# Altium PCB LP_LED_CUBE_8x8x8.PcbDoc
Units mil, origin at the board's own origin, x right, y up, seen from the top; angles counter-clockwise.
Board outline 5225 x 2080 mil, 2 copper layers (Top Layer, Bottom Layer), stack 65.792 mil thick; 94 components, 108 nets, 524 pads, 0 vias.
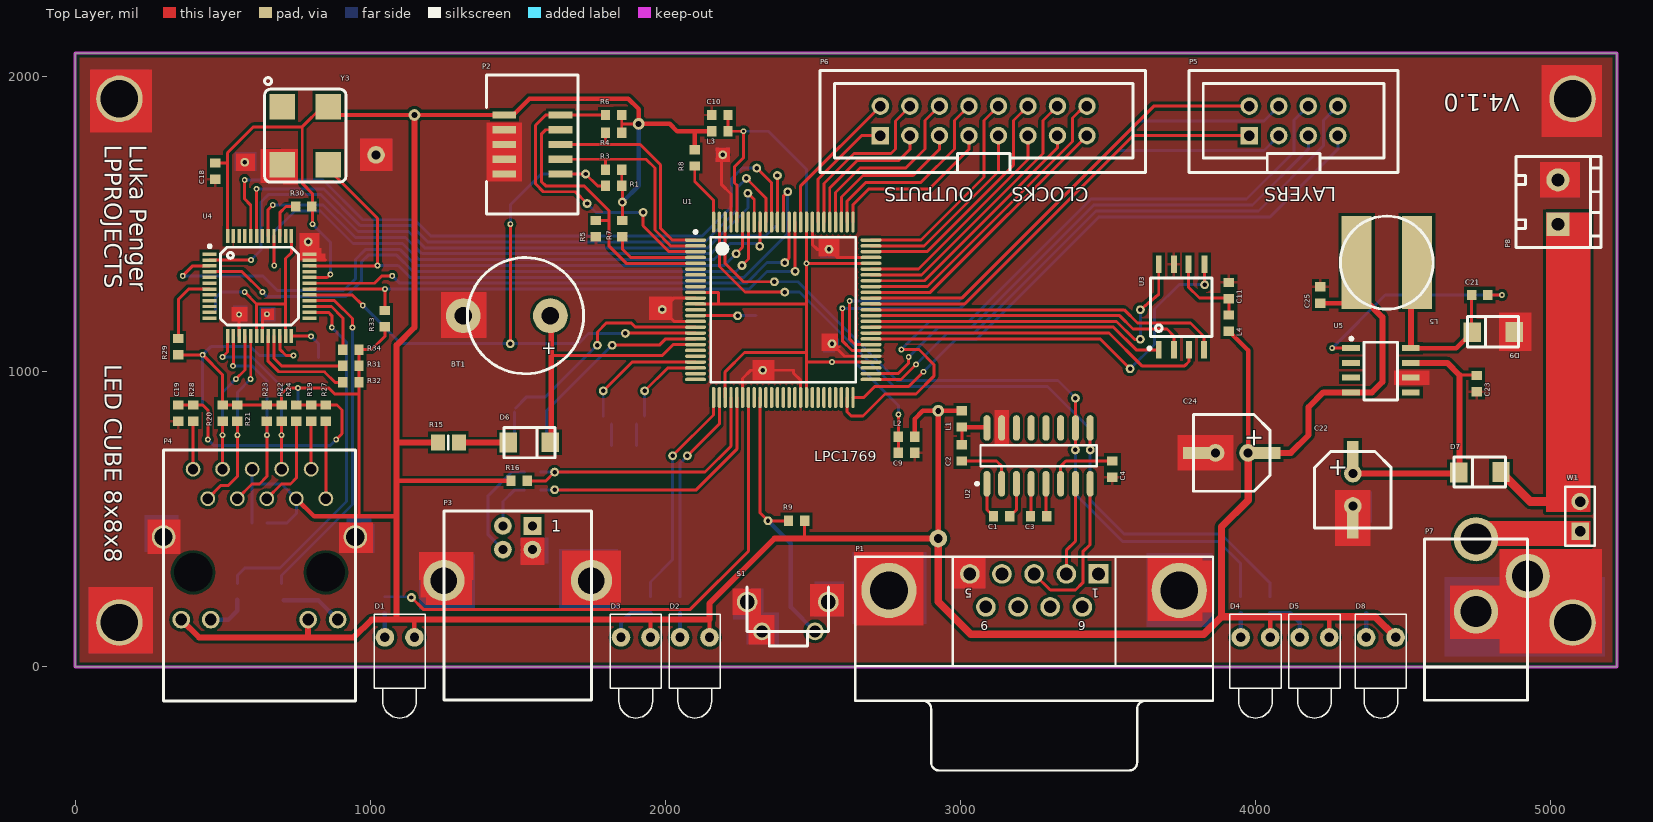
[diagram p0: Top Layer view]
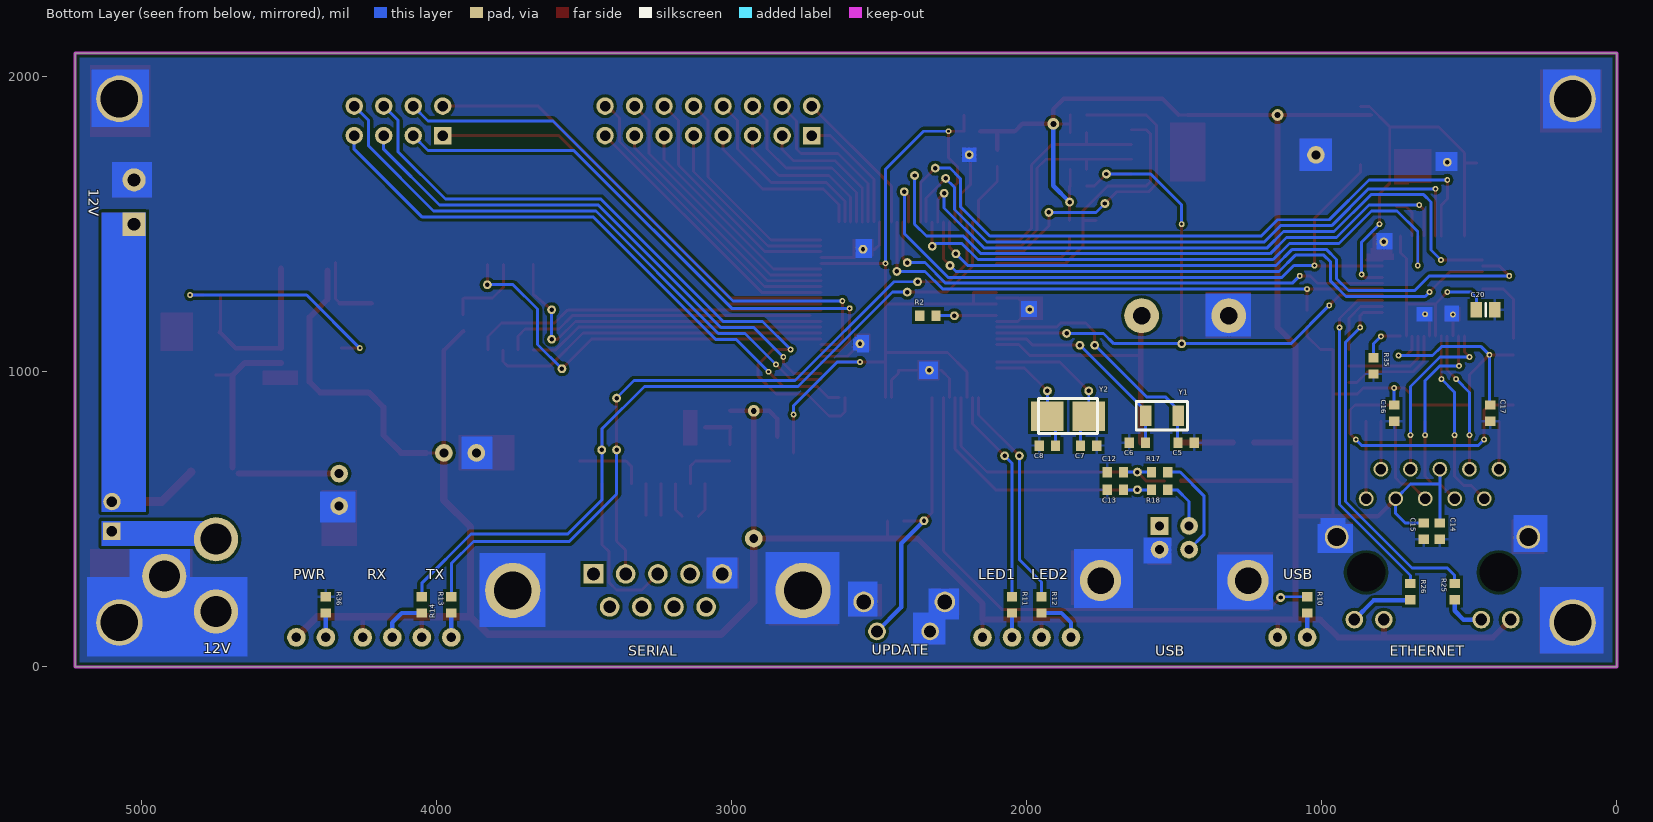
[diagram p1: Bottom Layer view, seen from below]

## Layer stack, top to bottom
Top Layer: signal copper 1.4
Dielectric: core 62.9921, FR-4, Dk 4.8
Bottom Layer: signal copper 1.4

## Board outline
0,0 0,2080 5225,2080 5225,0

## Design rules (kind name [scope] priority, off if disabled: settings)
Clearance [All] p1: gap=10
PolygonConnect [All] p1: connectstyle=Relief reliefconductorwidth=10 reliefentries=4 polygonreliefangle="90 Angle"
RoutingVias [All] p1: holewidth=28 width=50 viastyle="Through Hole" minholewidth=28 minwidth=50 maxholewidth=28 maxwidth=50
SilkscreenOverComponentPads [All] p1: minsilkscreentomaskgap=10
SolderMaskExpansion [All] p1: expansion=4
Width [All] p1: maxlimit=10 minlimit=10 preferedwidth=10
27 further rules are at their usual default settings.

## Classes and differential pairs
component class CPU: BT1 C1 C2 C3 C4 C5 C6 C7 C8 C9 C10 C11 C12 C13 D1 D2 D3 D4 D5 D6 L1 L2 L3 L4 P1 P2 P3 R1 R2 R3 R4 R5 R6 R7 R8 R9 R10 R11 R12 R13 R14 R15 R16 R17 R18 S1 U1 U2 U3 Y1 Y2
component class ETH: C14 C15 C16 C17 C18 C19 C20 P4 R19 R20 R21 R22 R23 R24 R25 R26 R27 R28 R29 R30 R31 R32 R33 R34 R35 U4 Y3
component class POWER: C21 C22 C23 C24 C25 D7 D8 D9 L5 P7 P8 R36 U5 W1
component class LED: P5 P6

## Components (designator, comment, footprint, x,y, rotation, side; value= is the part's Value field where it differs from the comment)
BT1 "Battery" "Battery capacitor" 1660,1190 r180 top
C1 "100n" 1608[0603] 3140,510 r180 top
C2 "100n" 1608[0603] 3005,725 r90 top
C3 "100n" 1608[0603] 3265,510 r180 top
C4 "100n" 1608[0603] 3515,670 r90 top
C5 "22p" 1608[0603] 1460,760 r0 bottom
C6 "22p" 1608[0603] 1625,760 r180 bottom
C7 "22p" 1608[0603] 1790,750 r0 bottom
C8 "22p" 1608[0603] 1930,750 r180 bottom
C9 "100n" 1608[0603] 2817.56,725 r0 top
C10 "100n" 1608[0603] 2185,1870 r0 top
C11 "100n" 1608[0603] 3910,1275 r270 top
C12 "18p" 1608[0603] 1700,660 r0 bottom
C13 "18p" 1608[0603] 1700,600 r0 bottom
C14 "100n" 1608[0603] 600,460 r90 bottom
C15 "100n" 1608[0603] 655,460 r90 bottom
C16 "100n" 1608[0603] 755,860 r90 bottom
C17 "100n" 1608[0603] 430,860 r90 bottom
C18 "100n" 1608[0603] 475,1680 r90 top
C19 "100n" 1608[0603] 350,860 r270 top
C20 "1uF" 6-0805_L 445,1210 r180 bottom
C21 "10n" 1608[0603] 4760,1260 r0 top
C22 "220uF" "SMD CAPACITOR 220uF" 4330,600 r0 top
C23 "100n" 1608[0603] 4750,960 r270 top
C24 "220uF" "SMD CAPACITOR 220uF" 3920,725 r270 top
C25 "100n" 1608[0603] 4220,1260 r90 top
D1 "USB LED" LED-1 1100,100 r270 top
D2 "LED1" LED-1 2100,100 r270 top
D3 "LED2" LED-1 1900,100 r270 top
D4 "LED4" LED-1 4000,100 r270 top
D5 "LED5" LED-1 4200,100 r270 top
D6 "1N5819" "DO-214AC (SMA)" 1540,760 r0 top
D7 "1N5819" "DO-214AC (SMA)" 4760,660 r180 top
D8 "POWER LED" LED-1 4425,100 r270 top
D9 "1N5819" "DO-214AC (SMA)" 4805,1135 r180 top
L1 "Inductor" 1608[0603] 3005,840 r90 top
L2 "Inductor" 1608[0603] 2817.56,780 r180 top
L3 "Inductor" 1608[0603] 2185,1815 r0 top
L4 "Inductor" 1608[0603] 3910,1165 r270 top
L5 "100uH" SDR0805-101KL 4445,1370 r180 top
P1 "RS232" DSUB1.385-2H9 3250,-115 r180 top
P2 "JTAG Connector ULINK" "SMT IDC Header 2X5 10 PIN 1.27mm" 1550,1770 r0 top
P3 "USB B" "USB B" 1500,385 r0 top
P4 "RJ45 Ethernet" "RJ45 Ethernet connector" 625,415 r90 top locked
P5 "LED Layers Connector" IDC-2x4 3775,1675 r0 top
P6 "LED Connector" IDC-2x8 2525,1675 r0 top
P7 "DC Connector" "DC Connector" 4835,310 r180 top
P8 "Power to board" "Block2 - 3.81" 5025,1650 r90 top
R1 "10k" 1608[0603] 1825,1630 r0 top
R2 "NO" 1608[0603] 2335,1190 r0 bottom
R3 "10k" 1608[0603] 1825,1685 r0 top
R4 "10k" 1608[0603] 1825,1810 r0 top
R5 "10k" 1608[0603] 1765,1485 r270 top
R6 "10k" 1608[0603] 1825,1870 r0 top
R7 "10k" 1608[0603] 1855,1485 r90 top
R8 "10k" 1608[0603] 2100,1725 r90 top
R9 "1k" 1608[0603] 2445,495 r180 top
R10 "470R" 1608[0603] 1050,210 r270 bottom
R11 "470R" 1608[0603] 2050,210 r270 bottom
R12 "470R" 1608[0603] 1950,210 r270 bottom
R13 "470R" 1608[0603] 3950,210 r270 bottom
R14 "470R" 1608[0603] 4050,210 r270 bottom
R15 "50R" 6-0805_N 1265,760 r180 top
R16 "1k5" 1608[0603] 1505,630 r0 top
R17 "33R" 1608[0603] 1550,660 r180 bottom
R18 "33R" 1608[0603] 1550,600 r180 bottom
R19 "75R 1%" 1608[0603] 800,860 r90 top
R20 "49R9 1%" 1608[0603] 500,860 r90 top
R21 "49R9 1%" 1608[0603] 550,860 r90 top
R22 "49R9 1%" 1608[0603] 700,860 r90 top
R23 "49R9 1%" 1608[0603] 650,860 r90 top
R24 "75R 1%" 1608[0603] 750,860 r90 top
R25 "470R" 1608[0603] 550,255 r90 bottom
R26 "470R" 1608[0603] 700,255 r90 bottom
R27 "75R 1%" 1608[0603] 850,860 r270 top
R28 "75R 1%" 1608[0603] 400,860 r270 top
R29 "10k" 1608[0603] 350,1085 r270 top
R30 "2k2" 1608[0603] 775,1560 r180 top
R31 "2k2" 1608[0603] 935,1020 r180 top
R32 "2k2" 1608[0603] 935,965 r0 top
R33 "2k2" 1608[0603] 1050,1180 r90 top
R34 "2k2" 1608[0603] 935,1075 r180 top
R35 "4k7" 1608[0603] 825,1020 r270 bottom
R36 "470R" 1608[0603] 4375,210 r270 bottom
S1 "FW Update" SWITCH-TACTILE-90 2415,170 r0 top
U1 "LPC176XFBD100" SOT407-1_N 2400,1210 r0 top
U2 "TRS3232" SOIC16_N 3265,715 r90 top
U3 "AT45DB321E" AT45DB321 3750,1220 r90 top
U4 "DP83848C" DP83848C 625,1290 r0 top
U5 "LM2671 - 3.3V" SOIC8_Narrow 4425,1005 r0 top
W1 "Jumper" HDR1X2 5100,460 r90 top
Y1 "32.768 kHz" "Crystal FC-135" 1550,850 r0 bottom
Y2 "12 MHz" "5x3.2 Crystal" 1860,850 r0 bottom
Y3 "XTAL 50MHz" "XTAL ACT9200 5x7mm" 780,1800 r270 top

## Footprints (in the part's own frame and the unit in brackets; to place one, negate y for a bottom-side part, rotate by r counter-clockwise, add the part's x,y. Pads: shape width x height; smd on the part's side, far side on the other; paste and mask are expansions set on the pad)
"5x3.2 Crystal" [mil]
  rect 110x100 smd: 1(-70,0) 2(70,0)
  silkscreen extent -100,-60 100,60
6-0805_L [mm] "Chip Resistor, Body 2.0x1.2mm, IPC High Density"
  rect 1x1.3 smd: 1(-0.8,0) 2(0.8,0)
  silkscreen extent 0,-0.55 0,0.55, body extent -1.07,-0.7 1.07,0.7, height 0.7
6-0805_N [mm] "Chip Resistor, Body 2.0x1.2mm, IPC Medium Density"
  rect 1.2x1.4 smd: 1(-0.9,0) 2(0.9,0)
  silkscreen extent 0,-0.6 0,0.6, body extent -1.07,-0.7 1.07,0.7, height 0.7
1608[0603] [mm] "Chip Capacitor, Body 1.6x0.8mm, IPC High Density"
  rect 0.8x0.9 smd: 1(-0.7,0) 2(0.7,0)
  body extent -0.87,-0.48 0.87,0.48, height 1.3
AT45DB321 [mm] "SPI Flash SOIC 8"
  rect 1.5x0.508 smd: 1(-3.7,1.975) 2(-3.7,0.675) 3(-3.7,-0.625) 4(-3.7,-1.925) 5(3.65,-1.975) 6(3.65,-0.575) 7(3.65,0.675) 8(3.65,1.975)
  silkscreen extent -3.7,-2.62 2.5,2.9
"Battery capacitor" [mm] "Battery cap"
  round 3 hole 1.5: 1(1.25,0) 2(8.75,0)
  silkscreen extent -1.6,-5 8.4,5
"Block2 - 3.81" [mm] "3.81mm"
  rect 2x2 hole 1.1: 1(-3.81,0)
  round 2 hole 1.1: 2(0,0)
  silkscreen extent -5.81,-3.7 2,3.6
"Crystal FC-135" [mm] "3.2x1.5mm"
  rect 1x1.8 smd: 1(-1.6,-0.02) 2(1.194,-0.025)
  silkscreen extent -2.4,-1.25 2.01,1.2
"DC Connector" [mil]
  round 150 hole 105: 1(87.5,-122.5) 2(87.5,122.5) 3(-87.5,2.5)
  silkscreen extent -88,-123 262,423
"DO-214AC (SMA)" [mm]
  rect 1.5x1.7 smd: 1(-1.829,0) 2(1.803,0.025)
  silkscreen extent -2.21,-1.31 2.21,1.28
DP83848C [mm] "Ethernet PHY LQFP48"
  rect 1.2x0.3 smd: 1(-4.3,2.75) 2(-4.3,2.25) 3(-4.3,1.75) 4(-4.3,1.25) 5(-4.3,0.75) 6(-4.3,0.25) 7(-4.3,-0.25) 8(-4.3,-0.75) 9(-4.3,-1.25) 10(-4.3,-1.75) 11(-4.3,-2.25) 12(-4.3,-2.75) 25(4.3,-2.75) 26(4.3,-2.25) 27(4.3,-1.75) 28(4.3,-1.25) 29(4.3,-0.75) 30(4.3,-0.25) 31(4.3,0.25) 32(4.3,0.75) 33(4.3,1.25) 34(4.3,1.75) 35(4.3,2.25) 36(4.3,2.75)
  rect 0.3x1.2 smd: 13(-2.75,-4.3) 14(-2.25,-4.3) 15(-1.75,-4.3) 16(-1.25,-4.3) 17(-0.75,-4.3) 18(-0.25,-4.3) 19(0.25,-4.3) 20(0.75,-4.3) 21(1.25,-4.3) 22(1.75,-4.3) 23(2.25,-4.3) 24(2.75,-4.3) 37(2.75,4.3) 38(2.25,4.3) 39(1.75,4.3) 40(1.25,4.3) 41(0.75,4.3) 42(0.25,4.3) 43(-0.25,4.3) 44(-0.75,4.3) 45(-1.25,4.3) 46(-1.75,4.3) 47(-2.25,4.3) 48(-2.75,4.3)
  silkscreen extent -4.41,-3.35 3.35,3.56
DSUB1.385-2H9 [mm] "Connector; D Subminiature; 9 Position; Right Angle; Pitch 1.385 mm"
  rect 1.69x1.69 hole 1.09: 1(-5.54,-10.92)
  round 1.69 hole 1.09: 2(-2.77,-10.92) 3(0,-10.92) 4(2.77,-10.92) 5(5.54,-10.92) 6(-4.155,-8.08) 7(-1.385,-8.08) 8(1.385,-8.08) 9(4.155,-8.08)
  round 4.76 hole 3.26: 10(-12.495,-9.5) 11(12.495,-9.5)
  silkscreen extent -15.4,-12.4 15.4,6
HDR1X2 [mm] "Connector; Header; 2 Position"
  rect 1.5x1.5 hole 0.9: 1(0,0)
  round 1.5 hole 0.9: 2(2.54,0)
  silkscreen extent -1.27,-1.27 3.81,1.27
IDC-2x4 [mm] "IDC Male Connector"
  rect 1.5x1.5 hole 0.9: 1(5.182,3.175)
  round 1.5 hole 0.9: 2(5.182,5.715) 3(7.722,3.175) 4(7.722,5.715) 5(10.262,3.175) 6(10.262,5.715) 7(12.802,3.175) 8(12.802,5.715)
  silkscreen extent 0,0 17.98,8.8
IDC-2x8 [mm] "IDC Male Connector"
  rect 1.5x1.5 hole 0.9: 1(5.182,3.175)
  round 1.5 hole 0.9: 2(5.182,5.715) 3(7.722,3.175) 4(7.722,5.715) 5(10.262,3.175) 6(10.262,5.715) 7(12.802,3.175) 8(12.802,5.715) 9(15.342,3.175) 10(15.342,5.715) 11(17.882,3.175) 12(17.882,5.715) 13(20.422,3.175) 14(20.422,5.715) 15(22.962,3.175) 16(22.962,5.715)
  silkscreen extent 0,0 28,8.8
LED-1 [mm] "LED; 2 Leads"
  round 1.6 hole 0.8: 1(0,1.27) 2(0,-1.27)
  silkscreen extent -2,-2.2 6.95,2.2
"RJ45 Ethernet connector" [mil]
  round 50 hole 35: 1(155,175) 2(255,125) 3(155,75) 4(255,25) 5(155,-25) 6(255,-75) 7(155,-125) 8(255,-175) 9(255,225) 10(155,-225)
  round 60 hole 40: 11(-255,265) 12(-255,165) 13(-255,-165) 14(-255,-265)
  round 80 hole 62: GND(25,325) GND(25,-325)
  round 0 hole 130: ""(-95,225) ""(-95,-225)
  silkscreen extent -530,-325 320,325
SDR0805-101KL [mm] "SMD Power Inductor"
  rect 2.6x8 smd: 1(-2.6,0) 2(2.6,0)
  silkscreen extent -4,-4 4,4
"SMD CAPACITOR 220uF" [mil]
  round 60 hole 30: 1(0,55) 2(0,-55)
  rect 40x100 smd: 1(0,115) 2(0,-115)
  silkscreen extent -130,-130 130,130
"SMT IDC Header 2X5 10 PIN 1.27mm" [mil]
  rect 80x25 smd: 1(-95,100) 2(95,100) 3(-95,50) 4(95,50) 5(-95,0) 6(95,0) 7(-95,-50) 8(95,-50) 9(-95,-100) 10(95,-100)
  silkscreen extent -155,-235 155,235
SOIC8_Narrow [mil]
  rect 60x20 smd: 1(-101.5,75) 2(-101.5,25) 3(-101.5,-25) 4(-101.5,-75) 5(101.5,-75) 6(101.5,-25) 7(101.5,25) 8(101.5,75)
  silkscreen extent -105,-100 57,112
SOIC16_N [mm] "SOIC, 16-Leads, Body 9.9x3.9mm, Pitch 1.27mm, IPC Medium Density"
  oval 2.2x0.6 smd: 1(-2.4,4.445) 2(-2.4,3.175) 3(-2.4,1.905) 4(-2.4,0.635) 5(-2.4,-0.635) 6(-2.4,-1.905) 7(-2.4,-3.175) 8(-2.4,-4.445) 9(2.4,-4.445) 10(2.4,-3.175) 11(2.4,-1.905) 12(2.4,-0.635) 13(2.4,0.635) 14(2.4,1.905) 15(2.4,3.175) 16(2.4,4.445)
  silkscreen extent -2.52,-5 0.9,5.42, body extent -2,-5 2,5, height 1.91
SOT407-1_N [mm] "Thin QFP, 100-Leads, Body 14x14mm, Pitch 0.5mm, IPC Medium Density"
  oval 1.8x0.3 smd: 1(-7.55,6) 2(-7.55,5.5) 3(-7.55,5) 4(-7.55,4.5) 5(-7.55,4) 6(-7.55,3.5) 7(-7.55,3) 8(-7.55,2.5) 9(-7.55,2) 10(-7.55,1.5) 11(-7.55,1) 12(-7.55,0.5) 13(-7.55,0) 14(-7.55,-0.5) 15(-7.55,-1) 16(-7.55,-1.5) 17(-7.55,-2) 18(-7.55,-2.5) 19(-7.55,-3) 20(-7.55,-3.5) 21(-7.55,-4) 22(-7.55,-4.5) 23(-7.55,-5) 24(-7.55,-5.5) 25(-7.55,-6) 51(7.55,-6) 52(7.55,-5.5) 53(7.55,-5) 54(7.55,-4.5) 55(7.55,-4) 56(7.55,-3.5) 57(7.55,-3) 58(7.55,-2.5) 59(7.55,-2) 60(7.55,-1.5) 61(7.55,-1) 62(7.55,-0.5) 63(7.55,0) 64(7.55,0.5) 65(7.55,1) 66(7.55,1.5) 67(7.55,2) 68(7.55,2.5) 69(7.55,3) 70(7.55,3.5) 71(7.55,4) 72(7.55,4.5) 73(7.55,5) 74(7.55,5.5) 75(7.55,6)
  oval 0.3x1.8 smd: 26(-6,-7.55) 27(-5.5,-7.55) 28(-5,-7.55) 29(-4.5,-7.55) 30(-4,-7.55) 31(-3.5,-7.55) 32(-3,-7.55) 33(-2.5,-7.55) 34(-2,-7.55) 35(-1.5,-7.55) 36(-1,-7.55) 37(-0.5,-7.55) 38(0,-7.55) 39(0.5,-7.55) 40(1,-7.55) 41(1.5,-7.55) 42(2,-7.55) 43(2.5,-7.55) 44(3,-7.55) 45(3.5,-7.55) 46(4,-7.55) 47(4.5,-7.55) 48(5,-7.55) 49(5.5,-7.55) 50(6,-7.55) 76(6,7.55) 77(5.5,7.55) 78(5,7.55) 79(4.5,7.55) 80(4,7.55) 81(3.5,7.55) 82(3,7.55) 83(2.5,7.55) 84(2,7.55) 85(1.5,7.55) 86(1,7.55) 87(0.5,7.55) 88(0,7.55) 89(-0.5,7.55) 90(-1,7.55) 91(-1.5,7.55) 92(-2,7.55) 93(-2.5,7.55) 94(-3,7.55) 95(-3.5,7.55) 96(-4,7.55) 97(-4.5,7.55) 98(-5,7.55) 99(-5.5,7.55) 100(-6,7.55)
  silkscreen extent -7.67,-6.25 6.25,6.82, body extent -7,-7 7,7, height 1.6
SWITCH-TACTILE-90 [mil]
  round 60 hole 40: 1(-87.5,-50) 2(92.5,-50)
  round 70 hole 50: GND(-137.5,50) GND(137.5,50)
  silkscreen extent -138,-100 138,100
"USB B" [mil]
  rect 60x60 hole 30: 1(50,92.5)
  round 60 hole 30: 2(-50,92.5) 3(-50,12.5) 4(50,12.5)
  round 140 hole 90: 5(-250,-92.5) 5(250,-92.5)
  silkscreen extent -250,-498 250,142
"XTAL ACT9200 5x7mm" [mm] "5x7mm"
  rect 2.2x2.2 smd mask-25.4: 1(-2.5,-1.992) 2(2.5,-1.992) 3(2.5,1.992) 4(-2.5,1.992)
  silkscreen extent -4.99,-3.5 4,3.52

## Part data
BT1: "Multicell Battery"
C1 C2 C3 C4 C5 C6 C7 C8 C9 C10 C11 C12 C13 C14 C15 C16 C17 C18 C19 C20 C21 C23 C25: library part Cap, "Capacitor"
C22 C24: library part "Cap Pol1", "Capacitor"
D1 D2 D3 D4 D5 D8: library part LED0, "Typical INFRARED GaAs LED"
D6 D7 D9: library part "D Schottky", "Schottky Diode"
L5: library part Inductor, "Inductor"
P1: library part "D Connector 9", "Receptacle Assembly, 9 Position, Right Angle"
P2: "JTAG Connector"
P3: "USB Connector"
P4: "Ethernet Connector"
P5: library part "Header 4X2", "Header, 4-Pin, Dual row"
P6: library part "Header 8X2", "Header, 8-Pin, Dual row"
P7: "DC Power Connector"
P8: library part "Header 2", "Header, 2-Pin"
R1 R2 R3 R4 R5 R6 R7 R8 R9 R10 R11 R12 R13 R14 R15 R16 R17 R18 R19 R20 R21 R22 R23 R24 R25 R26 R27 R28 R29 R30 R31 R32 R33 R34 R35 R36: library part Res2, "Resistor"
S1: library part SW-PB, "Switch"
U1: library part LPC1768FBD100, "32-bit ARM Cortex-M3 microcontroller; up to 512 kB flash and 64 kB SRAM with Ethernet, USB 2.0 Host/Device/OTG, CAN"
U2: library part MAX2232, "Dual 232 +3V3"
U3: library part AT45DB321D, "SPI Flash 32MB"
U4: "Ethernet PHY"
U5: library part LM2671, "Switcher Voltage  Regulator"
W1: "Jumper Wire"
Y1 Y2: library part XTAL, "Crystal Oscillator"
Y3: library part "XTAL ACT9200"

## Free pads (board coordinates)
  round 30 hole 15: 0(575,1710) 4(790,1440) 5(3827.76,1295) 6(2565,1095) 7(1990,1210.92) 8(1140,235) 10(2195,1735) 17(1475,1095) 25(3390,735) 25(3440,735) 27(1625,600) 27(1625,660) 27(2330,1005) 28(2025,715) 29(2075,715) 35(1735,1570) 36(1925,1540) 37(2405,1270) 37(2405,1270) 38(2370,1305) 38(2370,1305) 39(3390,910.61) 41(2555,1415) 42(2440,1340) 43(2405,1370) 46(2415,1610) 50(2260,1360) 53(2240,1400) 56(2320,1425) 57(2380,1665) 61(2280,1605) 62(2275,1655) 63(2310,1690) 70(2348.13,495) 76(1855,1575) 79(3610,1110) 80(3610,1210) 82(3575,1010) 84(1790,935) 84(1930,935) 86(2245,1190) 88(1770,1090) 89(1820,1090) 91(1730,1670) 92(1865,1130.03)
  round 20 hole 10: 0(2625,1240) 1(2600,1215) 2(556.1,1193.9) 2(2800,1075) 2(4260,1080) 3(2825,1050) 3(4835,1260) 4(2850,1025) 5(2875,1000) 7(2478.74,1367.48) 8(2265,1815) 9(2565,1032.83) 10(2790,855) 12(1475,1500) 16(575,1270) 17(550,785) 18(500,785) 19(595,975) 20(545,975) 21(650,785) 22(700,785) 23(535.07,1020) 24(500,1050) 25(870,1150) 26(940,1150) 27(885,770) 28(450,770) 29(800,1120) 30(650,1195) 31(740,1055) 32(432.56,1057.44) 33(975,1225) 34(755,945) 44(1050,1280.02) 45(1075,1325) 47(1025,1360) 48(865,1330) 49(805,1500) 51(635,1270) 52(365,1325) 54(675,1360) 55(670,1565) 58(596.42,1378.58) 58(596.42,1378.58) 59(575,1650) 60(615,1620)
  round 40 hole 20: 11(1150,1870) 69(2925,867.56) 78(1910,1840)
  round 60 hole 30: 30(1020,1735) 68(2925,435)
  round 157.48 hole 125.98: ""(150,150) ""(150,1925) ""(5075,150) ""(5075,1925)

## Nets (pads, with @x,y where several pads share a name; then routed paths per layer and width w, separated by ;. In a path a pad name is that pad's centre, name@x,y a point inside that pad or via, vN(x,y) a via of type N, cw(c..) or ccw(c..) an arc to the next point about the centre after c; other vN are vias at no path point)
3V3: C14.2 C15.2 C16.2 C17.2 C18.2 C24.1 C25.1 D1.1 D2.1 D3.1 D4.1 D5.1 D8.1 L1.2 L2.1 L3.1 L4.2 L5.2 P2.1 P4.4 P4.7 P4.11 P4.13 pad.11 pad.31 pad.32 pad.34 pad.48 pad.49 pad.68 pad.69 pad.76 pad.78 R1.2 R3.2 R4.2 R6.2 R7.2 R8.2 R9.1 R15.2 R16.1 R20.2 R21.2 R22.2 R23.2 R29.2 R30.1 R31.1 R32.2 R33.1 R34.1 U4.22 U4.32 U4.48 U5.4 Y3.4 | length 16736.3
  Top Layer w10: R29.2 pad.32 500,990 R20.2 R21.2 R23.2 R22.2 700,925 720,945 pad.34 860,945 880,925 962.56,925 ; C18.2 516.73,1707.56 ; U4.48 516.73,1741.73 605,1830 770,1830 ; U4.22 693.9,1076.1 715,1055 pad.31 ; U4.32 854.53,1319.53 pad.48 ; pad.49 805,1603.37 770,1638.37 770,1830 ; Y3.4@868.43,1898.43 838.43,1898.43 770,1830 ; 962.56,512.44 962.56,925 ; R33.1 1050,1120 1005,1075 R34.1 R31.1 962.56,925 ; P2.1 P2.1@1485,1870 ; R1.2 R3.2 ; R4.2 R6.2 ; 1852.56,1840 pad.78 ; R7.2 pad.76 R1.2@1855,1630 ; 2472.56,437.44 R9.1 ; C24.1@3975,725 C24.1@4035,725 ; L5.2@4327.44,1232.44 4342.64,1247.64 L5.2
  Top Layer w15: P4.7 810,510 1090,510 ; Y3.4@835,1870 P2.1 ; 1090,630 R16.1 ; D1.1 1150,160 ; P2.1@1485,1870 1540,1925 1875,1925 1910,1890 pad.78 2015,1840 2040,1815 L3.1 ; D3.1 1950,160 ; R8.2 2100,1815 ; D2.1 2150,160 ; L2.1 2845.12,840.12 2872.56,867.56 pad.69 L1.2 ; L4.2 3975,1072.44 C24.1@3975,725 ; D4.1 4050,170 ; C25.1 L5.2@4327.44,1232.44 ; D5.1 4250,170
  Top Layer w20: P4.11 420,100 790,100 ; P4.13 790,100 ; pad.11 1150,1150 1090,1090 1090,760 ; R15.2 1090,760 ; pad.68 2370,435 2150,215 2150,160 1950,160 1150,160 1090,160 ; pad.68@2925,435.61 pad.69 ; C24.1@4035,725 4120,725 4180,785 4180,880 4230,930 4395,930 4430,965 4430,1185 4370,1245 L5.2@4370,1342.64 ; 790,100 945,100 1005,160 1090,160 ; 1090,160 1090,510 1090,630 1090,760
  Top Layer w25: pad.68 2925,220 3035,110 3825,110 3885,170 ; C24.1@3975,725 3975,565 3885,475 3885,170 ; D8.1 4405,170 4250,170 4050,170 3885,170
  Bottom Layer w10: C17.2@432.56,887.56 pad.32 460.12,1085 595,1085 625,1055 pad.31 ; C14.2 P4.4 ; 600,620 700,620 P4.7 750,520 717.56,487.56 C15.2@650,487.56 ; C16.2 pad.34 ; pad.49 865,1440 pad.48
  Bottom Layer w15: pad.76 1910,1630 pad.78
CLK1: P6.9 U1.74 | length 657.3
  Top Layer w10: U1.74 2876.54,1426.54 3129,1679 P6.9
CLK2: P6.10 U1.75 | length 731.6
  Top Layer w10: U1.75 2866.22,1446.22 3080,1660 3080,1851 P6.10
CLK3: P6.11 U1.70 | length 766.5
  Top Layer w10: U1.70 2857.8,1347.8 3229,1719 P6.11
CLK4: P6.12 U1.73 | length 824.5
  Top Layer w10: U1.73 2886.85,1406.85 3180,1700 3180,1851 P6.12
CLK5: P6.13 U1.68 | length 859.4
  Top Layer w10: U1.68 2878.43,1308.43 3329,1759 P6.13
CLK6: P6.14 U1.69 | length 933.7
  Top Layer w10: U1.69 2868.11,1328.11 3280,1740 3280,1851 P6.14
CLK7: P6.15 U1.66 | length 951.7
  Top Layer w10: U1.66 2898.06,1269.06 P6.15
CLK8: P6.16 U1.67 | length 1031.8
  Top Layer w10: U1.67 2888.74,1288.74 3380,1780 3380,1860 3420,1900 P6.16
COL1: P6.1 U1.82 | length 417.6
  Top Layer w10: U1.82 2518.11,1653.11 2665,1800 P6.1
COL2: P6.2 U1.85 | length 504.6
  Top Layer w10: U1.85 2459.06,1630.06 P6.2
COL3: P6.3 U1.80 | length 487.2
  Top Layer w10: U1.80 2557.48,1622.48 2650,1715 2790,1715 2829,1754 P6.3
COL4: P6.4 U1.81 | length 586.6
  Top Layer w10: U1.81 2537.8,1637.8 2640,1740 2765,1740 2780,1755 2780,1850 2829,1899 P6.4
COL5: P6.5 U1.78 | length 529.9
  Top Layer w10: U1.78 2596.85,1591.85 2670,1665 2840,1665 2929,1754 P6.5
COL6: P6.6 U1.79 | length 629.3
  Top Layer w10: U1.79 2577.17,1607.17 2660,1690 2815,1690 2880,1755 2880,1851 P6.6
COL7: P6.7 U1.76 | length 575.5
  Top Layer w10: U1.76 2636.22,1566.22 2690,1620 2895,1620 3029,1754 P6.7
COL8: P6.8 U1.77 | length 673.1
  Top Layer w10: U1.77 2616.54,1578.46 2680,1641.93 2866.93,1641.93 2980,1755 2980,1851 P6.8
E-CRS: pad.54 pad.56 U1.92 U4.40 | length 2063.8
  Top Layer w10: pad.54@674.21,1360.79 U4.40 ; pad.56@2321.26,1426.26 U1.92
  Bottom Layer w10: pad.54 675,1475 745,1545 831.86,1545 941.86,1435 1110,1435 1165,1380 2165,1380 2220,1435 2310,1435 pad.56
E-MDC: pad.43 pad.45 U1.87 U4.31 | length 1803.8
  Top Layer w10: U4.31 1014.84,1299.84 1040,1325 pad.45 ; pad.43 2419.69,1384.68 U1.87
  Bottom Layer w10: pad.45 1100,1300 2275,1300 2345,1370 pad.43
E-MDIO: pad.42 pad.44 R33.2 U1.86 U4.30 | length 1909.5
  Top Layer w10: U4.30 pad.44@1049.86,1280.16 ; R33.2 pad.44 ; pad.42@2439.37,1340.63 U1.86
  Bottom Layer w10: pad.44@1049.86,1280.16 2284.88,1280.16 ; 2285.02,1280.02 2345,1340 pad.42
E-REF-CLK: pad.46 pad.47 U1.88 U4.34 Y3.3 | length 2356.9
  Top Layer w10: U4.34 1025,1358.9 1025,1520 868.43,1676.57 Y3.3@868.43,1701.57 ; U1.88 2400,1595 pad.46
  Bottom Layer w10: pad.47 1095,1360 1135,1320 2266.72,1320 2415,1468.28 pad.46
E-RX-ER: pad.55 pad.57 U1.89 U4.41 | length 2254.6
  Top Layer w10: U4.41 654.53,1549.53 pad.55 ; U1.89 pad.57@2380.31,1665
  Bottom Layer w10: pad.55 840.15,1565 950.15,1455 1120,1455 1175,1400 2155,1400 2215,1460 2340,1460 2380,1500 pad.57
E-RXD0: pad.60 pad.62 U1.91 U4.43 | length 2203.3
  Top Layer w10: U4.43 pad.60@615.16,1620 ; pad.62 2340.94,1589.06 U1.91
  Bottom Layer w10: pad.60 841.72,1620 966.72,1495 1140,1495 1195,1440 2135,1440 2245,1550 2245,1625 pad.62
E-RXD1: pad.59 pad.63 U1.90 U4.44 | length 2367.5
  Top Layer w10: pad.59 575,1585 595.47,1564.53 U4.44 ; pad.63 2360.63,1639.37 U1.90
  Bottom Layer w10: pad.59 840,1650 975,1515 1150,1515 1205,1460 2125,1460 2225,1560 2225,1655 2260,1690 pad.63
E-TX-EN: pad.58 pad.61 U1.93 U4.2 | length 2486.8
  Top Layer w10: pad.61 2301.57,1583.43 U1.93 ; U4.2 596.42,1378.58 U4.2
  Bottom Layer w10: pad.61 2280,1555 2145,1420 1185,1420 1130,1475 958.43,1475 833.43,1600 655,1600 630,1575 630,1412.17 ; 630,1412.17 596.42,1378.58 630,1412.17
E-TXD0: pad.52 pad.53 U1.95 U4.3 | length 2818
  Top Layer w10: pad.52 398.9,1358.9 U4.3 ; pad.53 2262.2,1422.2 U1.95
  Bottom Layer w10: pad.53 2200,1360 1155,1360 1100,1415 985,1415 950,1380 950,1315 910,1275 ; 635,1325 685,1275 ; 635,1325 pad.52 635,1325 ; 635,1325 685,1275 ; 685,1275 910,1275 ; 685,1275 910,1275
E-TXD1: pad.50 pad.51 U1.94 U4.4 | length 2122.6
  Top Layer w10: U4.4 565.79,1339.21 pad.51 ; pad.50 2281.89,1381.89 U1.94
  Bottom Layer w10: pad.51 650,1255 918.28,1255 970,1306.72 970,1371.72 993.28,1395 1090,1395 1145,1340 2240,1340 pad.50
F-CS: U1.63 U3.4 | length 1211
  Top Layer w10: U1.63 3555,1210 3600,1165 3780,1165 3825.79,1119.21 U3.4
F-RES: U1.59 U3.3 | length 1169.2
  Top Layer w10: U1.59 3503.74,1131.26 3615,1020 3760,1020 3774.61,1034.61 U3.3
F-SCK: U1.62 U3.2 | length 1064
  Top Layer w10: 2735,1190 3540,1190 3585,1145 3700,1145 3723.43,1121.57 U3.2
F-SI: U1.60 U3.1 | length 1006.7
  Top Layer w10: U1.60 3519.06,1150.94 3595.67,1074.33 U3.1
F-SO: pad.79 pad.80 U1.61 U3.8 | length 1220.6
  Top Layer w10: U1.61 3529.37,1170.63 3590,1110 pad.79 ; pad.80 3672.24,1262.24 U3.8
  Bottom Layer w10: pad.79 pad.80
F-WP: pad.5@3827.76,1295 pad.82 U1.58 U3.5 | length 1429.3
  Top Layer w10: U1.58 3473.43,1111.57 pad.82 ; pad.5@3827.76,1295 U3.5
  Bottom Layer w10: pad.82 3657.76,1092.76 3657.76,1212.24 3740.51,1295 pad.5@3827.76,1295
GND: BT1.2 C4.1 C5.1 C6.1 C7.1 C8.1 C9.2 C10.1 C11.1 C12.2 C13.2 C14.1 C15.1 C16.1 C17.1 C18.1 C19.2 C20.2 C22.2 C23.2 C24.2 C25.2 D9.1 P1.5 P1.10 P1.11 P2.3 P2.5 P2.9 P3.4 P3.5 P7.2 P7.3 P8.2 pad. pad.0@575,1710 pad.2@556.1,1193.9 pad.4@790,1440 pad.6 pad.7@1990,1210.92 pad.10@2195,1735 pad.27@2330,1005 pad.30 pad.41 R5.2 R35.2 R36.1 S1.1 U1.11 U1.15 U1.31 U1.41 U1.55 U1.72 U1.83 U1.97 U2.15 U3.7 U4.15 U4.19 U4.35 U4.36 U4.47 U5.6 Y3.2 | length 1496.2
  Top Layer w10: U4.15 pad.2@556.1,1193.9 ; U4.19 634.84,1179.84 pad.30@650,1195 ; U4.35@794.29,1378.68 848.58,1378.58 ; U1.15 2030.29,1170.63 1990,1210.92 2028.45,1249.37 U1.11 ; pad.10@2190,1730 2190,1635 2222.83,1602.17 U1.97 ; U1.31 2262.2,977.2 2290,1005 2330,1005 2435,1005 2435,995 2459.06,970.94 U1.41 ; U1.83 2498.43,1431.57 2515,1415 pad.41 2582.83,1387.17 U1.72 ; pad.6 2607.48,1052.52 U1.55
LAYER1: P5.8 pad.4@2850,1025 U1.51 | length 2015.8
  Top Layer w10: U1.51 2798.78,973.78 pad.4@2850,1025
  Bottom Layer w10: pad.4@2850,1025 2955,1130 3045,1130 3460,1545 4010,1545 4230,1765 4230,1851 P5.8
LAYER2: P5.7 pad.5@2875,1000 U1.50 | length 2037.2
  Top Layer w10: U1.50 2672.76,912.76 2710,950 2825,950 pad.5@2875,1000
  Bottom Layer w10: pad.5@2875,1000 2985,1110 3055,1110 3470,1525 4050,1525 4279,1754 P5.7
LAYER3: P5.6 pad.2@2800,1075 U1.49 | length 2357.8
  Top Layer w10: U1.49 2616.54,863.46 2630,850 2670,850 2745,925 2850,925 2910,985 2910,1025 2860,1075 pad.2@2800,1075
  Bottom Layer w10: pad.2@2800,1075 2895,1170 3028.43,1170 3443.43,1585 3970,1585 4130,1745 4130,1851 P5.6
LAYER4: P5.5 pad.3@2825,1050 U1.52 | length 1854.5
  Top Layer w10: U1.52 2788.46,993.46 2825,1030 pad.3@2825,1050
  Bottom Layer w10: pad.3@2825,1050 2925,1150 3036.72,1150 3451.72,1565 3990,1565 4179,1754 P5.5
LAYER5: P5.4 pad.0@2625,1240 U1.57 | length 1937.1
  Top Layer w10: pad.0@2625,1240 2625,1110 2643.11,1091.89 U1.57
  Bottom Layer w10: pad.0@2625,1240 2995,1240 3605,1850 4029,1850 P5.4
LAYER6: P5.3 pad.1 U1.56 | length 1942.1
  Top Layer w10: pad.1 2600,1105 2632.8,1072.2 U1.56
  Bottom Layer w10: pad.1 3000,1215 3535,1750 4029,1750 P5.3
LAYER7: P5.2 U1.65 | length 1551.3
  Top Layer w10: U1.65 3004.37,1249.37 3655,1900 P5.2
LAYER8: P5.1 U1.64 | length 1518
  Top Layer w10: U1.64 3014.69,1229.68 3585,1800 P5.1
LED1: pad.29@2075,715 R11.1 U1.27 | length 730.5
  Top Layer w10: pad.29@2075,715 2183.46,823.46 U1.27
  Bottom Layer w10: R11.1 2050,690 pad.29@2075,715
LED2: pad.28@2025,715 R12.1 U1.26 | length 763.7
  Top Layer w10: pad.28@2025,715 2163.78,853.78 U1.26
  Bottom Layer w10: R12.1 1950,287.56 2025,362.56 pad.28@2025,715
LED_ACT: pad.25@870,1150 R25.2 U4.26 | length 1232.1
  Top Layer w10: U4.26 858.58,1201.42 870,1190 pad.25@870,1150
  Bottom Layer w10: R25.2 550,310 575,335 695,335 920,560 920,1100 pad.25@870,1150
LED_LINK: pad.26 R26.2 U4.28 | length 1167.7
  Top Layer w10: U4.28 879.21,1240.79 940,1180 pad.26
  Bottom Layer w10: R26.2 700,310 940,550 pad.26
"M232 +V": C2.1 U2.2 | length 201.7
  Top Layer w10: C2.1 3122.56,697.44 3140,680 U2.2
"M232 RX2": P1.3 U2.8 | length 544
  Top Layer w10: P1.3 3304.92,260 3390,260 3415,285 3415,390 3440,415 U2.8
"M232 TX2": P1.2 U2.7 | length 318.4
  Top Layer w10: P1.2 3359.06,395 3390,425.94 U2.7
NetBT1_1: BT1.1 D6.2 U1.19 | length 934.5
  Top Layer w10: 1613.58,1055 1990,1055 2026.89,1091.89 U1.19
  Top Layer w20: D6.2@1613.58,760 1613.58,1055 BT1.1@1613.58,1190
NetC1_1: C1.1 U2.3 | length 119.8
  Top Layer w10: C1.1 3190,532.44 U2.3
NetC1_2: C1.2 U2.1 | length 119.8
  Top Layer w10: U2.1 3090,532.44 C1.2
NetC2_2: C2.2 L1.1 U2.16 | length 144.9
  Top Layer w10: C2.2 L1.1
  Top Layer w15: L1.1 U2.16@3090,812.44
NetC3_1: C3.1 U2.5 | length 108
  Top Layer w10: C3.1@3290,512.56 U2.5
NetC3_2: C3.2 U2.4 | length 108
  Top Layer w10: C3.2@3240,512.56 U2.4
NetC4_2: C4.2 U2.6 | length 241.7
  Top Layer w10: U2.6 3340,680 3357.44,697.44 C4.2@3515,697.44
NetC5_2: C5.2 pad.88 U1.16 Y1.1 | length 864.1
  Top Layer w10: pad.88 1770,1135 1800,1165 1885,1165 1899.06,1150.95 U1.16
  Bottom Layer w10: C5.2@1489.31,760 Y1.1@1489.31,863.5 ; Y1.1@1493.09,877.56 1530.53,915 1593.9,915 pad.88@1769.45,1090.55
NetC6_2: C6.2 pad.89 U1.18 Y1.2 | length 714.4
  Top Layer w10: pad.89 1980,1090 2001.57,1111.57 U1.18
  Bottom Layer w10: C6.2@1597.99,760 1597.99,867.99 pad.89@1820.55,1090.55
NetC7_2: C7.2 pad.84@1790,935 U1.22 Y2.1 | length 510.7
  Top Layer w10: pad.84@1790,935 1887.83,1032.83 U1.22
  Bottom Layer w10: Y2.1 pad.84@1790,935 ; C7.2 Y2.1@1817.56,822.44
NetC8_2: C8.2 pad.84@1930,935 U1.23 Y2.2 | length 362.6
  Top Layer w10: pad.84@1930,935 2008.15,1013.15 U1.23
  Bottom Layer w10: C8.2 Y2.2@1902.44,822.44 ; Y2.2 pad.84@1930,935
NetC9_1: C9.1 C10.2 L2.2 L3.2 pad.7@2478.74,1367.48 pad.8@2265,1815 pad.9 pad.10@2790,855 U1.10 U1.12 U1.28 U1.42 U1.54 U1.71 U1.84 U1.96 | length 3376.2
  Top Layer w10: U1.12 2180,1229.68 ; U1.10 2180,1269.06 2180,1229.68 ; U1.28 2203.15,999.78 2268.37,1065 2478.74,1065 ; C10.2 L3.2 2265,1815 2265,1725 2235,1695 2235,1640 2242.52,1632.48 U1.96 ; 2478.43,1229.68 2180,1229.68 ; U1.42 2478.74,1032.83 ; U1.84 pad.7@2478.74,1367.48 ; U1.54 pad.9 2478.74,1032.83 ; U1.71 pad.7@2478.74,1367.48 ; C9.1 L2.2 pad.10@2790,855 ; 2478.74,1032.83 2478.74,1065 ; 2478.74,1065 pad.7@2478.74,1367.48
  Bottom Layer w10: pad.8@2265,1815 2350,1815 2478.74,1686.26 pad.7@2478.74,1367.48 ; pad.9 2642.17,1032.83 2790,885 pad.10@2790,855
NetC11_2: C11.2 L4.1 U3.6 | length 285.1
  Top Layer w10: U3.6 3772.64,1287.36 3810,1250 3907.44,1250 C11.2 L4.1
NetC19_1: C19.1 pad.27@885,770 pad.28@450,770 R19.2 R24.2 R27.1 R28.1 | length 929.4
  Top Layer w10: C19.1 R28.1 432.44,887.56 450,870 pad.28@450,770 ; R24.2 R19.2 R27.1 887.44,887.56 905,870 905,790 pad.27@885,770
  Bottom Layer w10: pad.28@450,770 470,750 865,750 pad.27@885,770
NetC21_1: C21.1 D9.2 L5.1 U5.8 | length 623.4
  Top Layer w10: D9.2@4732.44,1135.56 C21.1
  Top Layer w15: U5.8@4527.5,1080 4680,1080 D9.2
  Top Layer w20: U5.8@4527.5,1080 L5.1@4527.5,1350.14
NetC21_2: C21.2 pad.2@4260,1080 pad.3@4835,1260 U5.1 | length 760.5
  Top Layer w10: pad.2@4260,1080 U5.1 ; C21.2 pad.3@4835,1260
  Bottom Layer w10: pad.2@4260,1080 4440,1260 pad.3@4835,1260
NetC22_1: C22.1 C23.1 D7.2 U5.7 | length 893.6
  Top Layer w10: 4691.42,988.58 C23.1@4748.98,988.58
  Top Layer w20: C22.1@4330,655 D7.2@4671.42,655 ; U5.7@4527.5,1030 4650,1030 4691.42,988.58 D7.2@4691.42,675
NetD1_2: D1.2 R10.2 | length 82.4
  Bottom Layer w15: D1.2 R10.2
NetD2_2: D2.2 R11.2 | length 82.4
  Bottom Layer w15: D2.2 R11.2
NetD3_2: D3.2 R12.2 | length 163.4
  Bottom Layer w15: D3.2 1850,150 1882.44,182.44 R12.2
NetD4_2: D4.2 R13.2 | length 82.4
  Bottom Layer w15: D4.2 R13.2
NetD5_2: D5.2 R14.2 | length 163.4
  Bottom Layer w15: R14.2 4117.56,182.44 4150,150 D5.2
NetD6_1: D6.1 R15.1 | length 167.6
  Top Layer w20: R15.1 D6.1
NetD7_1: D7.1 P8.1 W1.2 | length 309.4
  Top Layer w30: D7.1 4932,560 W1.2
NetD8_2: D8.2 R36.2 | length 82.4
  Bottom Layer w15: D8.2 R36.2
NetP3_2: P3.2 R18.2 | length 171.5
  Bottom Layer w10: P3.2 1450,560 1490,600 R18.2
NetP3_3: P3.3 R17.2 | length 358.8
  Bottom Layer w10: P3.3 1400,447.5 1400,580 1480,660 R17.2
NetP4_5: P4.5 R24.1 | length 321.4
  Top Layer w10: P4.5 700,620 730,620 750,640 R24.1
NetP4_8: P4.8 R19.1 | length 162.4
  Top Layer w10: P4.8 R19.1
NetP4_9: P4.9 R28.2 | length 162.4
  Top Layer w10: P4.9 R28.2
NetP4_10: P4.10 R27.2 | length 262.4
  Top Layer w10: P4.10 R27.2
NetP4_12: P4.12 R25.1 | length 139.9
  Bottom Layer w15: P4.12 520,160 550,190 R25.1
NetP4_14: P4.14 R26.1 | length 209.5
  Bottom Layer w15: R26.1@707.44,225 825,225 P4.14
NetP7_1: P7.1 W1.1
NetR9_2: pad.70 R9.2 S1.2 U1.34 | length 939.2
  Top Layer w10: U1.34 2321.26,521.87 pad.70 R9.2
  Bottom Layer w15: pad.70 2425,418.13 2425,202.5 S1.2
NetR29_1: R29.1 U4.7 | length 252.5
  Top Layer w10: R29.1@350.16,1112.72 350.16,1245.16 385.16,1280.16 U4.7
NetR30_2: R30.2 U4.39 | length 141.9
  Top Layer w10: U4.39 693.9,1538.9 715,1560 R30.2
NetR31_2: R31.2 U4.21 | length 318.8
  Top Layer w10: U4.21 674.21,1045.79 700,1020 R31.2
NetR32_1: R32.1 U4.20 | length 367.3
  Top Layer w10: U4.20 654.53,1035.47 690,1000 845,1000 ; 845.71,999.29 880.71,964.29 R32.1@908.15,964.29
NetR34_2: R34.2 U4.27 | length 236.7
  Top Layer w10: U4.27 868.9,1221.1 907.44,1182.56 R34.2
NetR35_1: pad.29@800,1120 R35.1 U4.24 | length 148.8
  Top Layer w10: U4.24 pad.29@799.29,1120.71
  Bottom Layer w10: pad.29@800,1120 825,1095 R35.1
PFB: C20.1 pad.16 U4.18 U4.23 U4.37 | length 758.7
  Top Layer w10: pad.16 615,1230 713.58,1230 ; U4.18 615.16,1229.84 ; U4.23 713.58,1230 ; U4.37 733.27,1403.27 713.58,1383.58 713.58,1230
  Bottom Layer w10: C20.1 476.5,1251.5 495,1270 pad.16
RESET: P2.10 pad.12 pad.17@1475,1095 pad.33 pad.91 pad.92 R1.1 U1.17 U4.29 | length 2327.8
  Top Layer w10: U4.29 939.53,1260.47 pad.33 ; pad.17@1475,1095 pad.12 ; P2.10 pad.91 1770,1630 R1.1 ; pad.92@1866.23,1131.26 U1.17
  Bottom Layer w10: pad.33 1105,1095 1475,1095 1705,1095 1740.03,1130.03 pad.92 ; pad.12 1475,1565 1580,1670 pad.91
RSTOUT: pad.86 R2.1 U1.14 | length 204.4
  Top Layer w10: U1.14 pad.86@2244.68,1190.32
  Bottom Layer w10: pad.86 R2.1
RTCK: R8.1 U1.100 | length 214.1
  Top Layer w10: R8.1@2100,1694.88 2100,1645 2163.78,1581.22 U1.100
RXD+: P4.3 pad.21 pad.23 R23.1 U4.14 | length 738.5
  Top Layer w10: pad.23@536.42,1021.35 U4.14 ; P4.3 600,620 625,620 650,645 pad.21 R23.1
  Bottom Layer w10: pad.23 600,1020 650,970 pad.21
RXD-: P4.6 pad.22 pad.24 R22.1 U4.13 | length 646.5
  Top Layer w10: pad.24 516.73,1066.73 U4.13 ; P4.6 R22.1
  Bottom Layer w10: pad.24 600,1050 700,950 pad.22
TCK: P2.4 R5.1 U1.5 | length 981.7
  Top Layer w10: P2.4 1595,1820 1580,1805 1580,1645 1595,1630 1725,1630 1810,1545 1810,1425 1867.52,1367.48 U1.5 ; R5.1 1807.44,1512.56
TDI: P2.8 R3.1 U1.2 | length 734.9
  Top Layer w10: P2.8 1935,1720 1965,1690 1965,1480 2018.46,1426.54 U1.2 ; R3.1 1797.44,1717.56
TDO/SW0: P2.6 R4.1 U1.1 | length 757.8
  Top Layer w10: P2.6 1915,1770 1983.78,1701.22 1983.78,1486.22 2023.78,1446.22 U1.1 ; 1797.44,1770 R4.1
TMS: P2.2 pad.35 pad.36 R6.1 U1.3 | length 1114.6
  Top Layer w10: pad.35 1695,1610 1586.72,1610 1560,1636.72 1560,1835 1595,1870 P2.2 R6.1 ; pad.36 1925,1495 2013.15,1406.85 U1.3
  Bottom Layer w10: pad.35 1765,1540 pad.36
TRST: R7.1 U1.4 | length 301.7
  Top Layer w10: R7.1 1855,1415 1882.83,1387.17 U1.4
TXD+: P4.1 pad.17@550,785 pad.19 R21.1 U4.17 | length 672.4
  Top Layer w10: P4.1 495,615 520,615 550,645 550,785 R21.1 ; pad.19@595.47,975.47 U4.17
  Bottom Layer w10: pad.17@550,785 550,930 pad.19
TXD-: P4.2 pad.18 pad.20 R20.1 U4.16 | length 529.5
  Top Layer w10: P4.2 pad.18 R20.1 ; pad.20 575.79,1005.79 U4.16
  Bottom Layer w10: pad.18 500,930 pad.20
U0_RXD: pad.25@3440,735 pad.37 R14.1 U1.99 U2.9 | length 2723
  Top Layer w10: U1.99 2183.46,1356.54 2270,1270 pad.37@2405,1270 ; pad.25@3440,735 U2.9
  Bottom Layer w10: pad.37@2405,1270 2455,1270 2775,950 3295.61,950 3440,805.61 3440,735 3440,565 3555,450 3883.28,450 4050,283.28 R14.1
U0_TXD: pad.25@3390,735 pad.38 pad.39 R13.1 U1.98 U2.10 | length 2611
  Top Layer w10: U1.98 2203.15,1366.85 2265,1305 pad.38@2370,1305 ; pad.25@3390,735 U2.10 ; U2.10@3390,810.1 pad.39
  Bottom Layer w10: pad.38@2370,1305 2450,1305 2785,970 3330.61,970 pad.39 ; pad.25@3390,735 3390,585 3550,425 3875,425 3950,350 R13.1
"USB D+": C12.1 pad.27@1625,660 R16.2 R17.1 U1.29 | length 998.9
  Top Layer w10: R16.2 1595,630 1625,660 2135,660 2222.83,747.83 U1.29
  Bottom Layer w10: R17.1 1625,660 C12.1
"USB D-": C13.1 pad.27@1625,600 R18.1 U1.30 | length 944.6
  Top Layer w10: pad.27@1625,600 2105,600 2242.52,737.52 U1.30
  Bottom Layer w10: R18.1 1625,600 C13.1
"USB LED": pad.8@1140,235 R10.1 U1.32 | length 1848.3
  Top Layer w10: pad.8@1140,235 1180,195 2085,195 2281.89,391.89 U1.32
  Bottom Layer w10: R10.1 pad.8@1137.44,237.56
pads on no net: P1.1 P1.4 P1.6 P1.7 P1.8 P1.9 P2.7 P3.1 P4. P4.GND R2.2 S1.GND U1.6 U1.7 U1.8 U1.9 U1.13 U1.20 U1.21 U1.24 U1.25 U1.33 U1.35 U1.36 U1.37 U1.38 U1.39 U1.40 U1.43 U1.44 U1.45 U1.46 U1.47 U1.48 U1.53 U2.11 U2.12 U2.13 U2.14 U4.1 U4.5 U4.6 U4.8 U4.9 U4.10 U4.11 U4.12 U4.25 U4.33 U4.38 U4.42 U4.45 U4.46 U5.2 U5.3 U5.5 Y3.1
copper on no net: | length 296.6
  Top Layer w10: 2190,1730 2195,1735
  Bottom Layer w10: 635,1270 650,1255 918.28,1255

## Polygon pours and split planes (outlines as drawn)
GND on Top Layer "Top Layer" (solid, remove dead copper, pour order 4): 0,2080 0,0 5225,0 5225,2080
GND on Bottom Layer "Bottom Layer" (solid, remove dead copper, pour order 6): 5225,2080 5225,0 0,0 0,2080

## Keep-outs
Keep-Out Layer:
  the board outline again, w10

## Other copper
Top Layer:
  rectangle net GND: 705,1635 754.71,1754.88
  rectangle net GND: 2975,265 3085,370
  rectangle net GND: 760,1403.27 827.91,1470
  rectangle net GND: 245,382.66 358.13,500
  rectangle net GND: 895,385 1010,490
  rectangle net GND: 3115,750 3165,870
  rectangle net GND: 4470,955 4590,1005
  rectangle net GND: 4825,1070 4935,1200
  rectangle net GND: 3735,665 3925,785
  rectangle net GND: 4270,410 4390,600
  rectangle net GND: 45,45 265,270
  rectangle net GND: 630,1175 675,1215
  rectangle net GND: 530,1170 585,1220
  rectangle net GND: 50,1810 260,2025
  rectangle net GND: 4970,1795 5175,2040
  rectangle net GND: 3800,185 3855,360
  rectangle net GND: 3635,155 3820,370
  rectangle net GND: 2580,1080 2593.89,1089.48
  rectangle net GND: 1395,1645 1515,1845
  rectangle net GND: 1170.11,235.66 1193.16,297.5
  rectangle net GND: 1190,210 1345,330
  rectangle net GND: 1165,295 1350,390
  rectangle net GND: 1650,210 1850,395
  rectangle net GND: 1510,345 1590,437.5
  rectangle net GND: 2282.5,75 2370,175.27
  rectangle net GND: 2228.57,175.27 2325,264.73
  rectangle net GND: 2490,170 2605,280
  rectangle net GND: 2640,140 2875,390
  rectangle net GND: 4826.4,45 5175,399.8
  rectangle net GND: 4660,95 4840,275
  rectangle net GND: 755,1378.58 848.58,1400
  rectangle net GND: 760,1400 835,1420
  rectangle net GND: 628.27,1640 735,1754.88
  rectangle net GND: 2530,1070 2585,1130
  rectangle net GND: 2170,1710 2220,1760
  rectangle net GND: 2520,1390 2590,1450
  rectangle net GND: 2295,970 2370,1040
  rectangle net GND: 1945,1175.92 2025,1255
  rectangle net GND: 545,1680 610,1740
  rectangle net GND: 1240,1115 1395,1270
  rectangle net GND: 4965,1590 5100,1710
  rectangle net GND: 965,1680 1075,1790
  rectangle net NetD7_1: 4985,525 5135,1540
  rectangle net NetP7_1: 4750,410 5135,495
Bottom Layer:
  rectangle net GND: 760,1415 815,1470
  rectangle net GND: 4275,490 4395,595
  rectangle net GND: 3810,670 3915,780
  rectangle net GND: 2583.02,1100 2589.5,1113.02
  rectangle net GND: 2574.75,1113.02 2583.02,1118.55
  rectangle net GND: 2574.75,1100 2583.02,1113.02
  rectangle net GND: 2574.75,1071.45 2589.5,1100
  rectangle net GND: 2535,1065 2575,1125
  rectangle net GND: 625,1170 680,1220
  rectangle net GND: 535,1170 585,1225
  rectangle net GND: 55,1825 250,2025
  rectangle net GND: 45,45 260,270
  rectangle net GND: 920,470 1005,505
  rectangle net GND: 895.3,385 1015,483.67
  rectangle net GND: 235,390 350,515
  rectangle net GND: 1165,195 1355,380
  rectangle net GND: 1640,200 1840,400
  rectangle net GND: 1510,350 1605,437.5
  rectangle net GND: 2275,75 2385,185
  rectangle net GND: 2230,159.69 2332.5,265
  rectangle net GND: 2505,170 2605,290
  rectangle net GND: 2635,145 2885,390
  rectangle net GND: 2980,265 3085,370
  rectangle net GND: 3630,135 3855,385
  rectangle net GND: 4835,265 5040,400
  rectangle net GND: 4640,35 5185,305
  rectangle net GND: 4975,1830 5170,2025
  rectangle net GND: 2525,1385 2580,1450
  rectangle net GND: 2170,1710 2220,1760
  rectangle net GND: 2300,975 2365,1035
  rectangle net GND: 1965,1185 2020,1240
  rectangle net GND: 540,1680 615,1745
  rectangle net GND: 1240,1120 1395,1265
  rectangle net GND: 4965,1590 5100,1710
  rectangle net GND: 965,1680 1075,1790
  rectangle net NetD7_1: 4985,525 5135,1540
  rectangle net NetP7_1: 4760,410 5135,495

## Silkscreen, mask and mechanical layers (free items; w line width, h text height)
Top Overlay:
  text "V4.1.0" at 4895,1960 h100 r180
  text "LPPROJECTS" at 80,1770 h100 r270
  text "Luka Penger" at 165,1770 h100 r270
  text "OUTPUTS" at 3045,1640 h80 r180
  text "CLOCKS" at 3435,1640 h80 r180
  text "LAYERS" at 4273,1640 h80 r180
  text "LED CUBE 8x8x8" at 80,1025 h100 r270
  text "LPC1769" at 2505,685 h60
Bottom Overlay:
  text "12V" at 5190,1620 h60 r90
  text "USB" at 1130,285 h60
  text "LED2" at 1985,285 h60
  text "LED1" at 2165,285 h60
  text "TX" at 4035,285 h60
  text "RX" at 4235,285 h60
  text "PWR" at 4485,285 h60
  text "12V" at 4790,35 h60
  text "UPDATE" at 2525,30 h60
  text "ETHERNET" at 770,25 h60
  text "USB" at 1565,25 h60
  text "SERIAL" at 3350,25 h60

## Text inside footprints (layer, text, board x,y; h text height)
BT1: Top Overlay "+" at 1632.44,1113.23 h78.74 r180
C22: Top Overlay "+" at 4245,650 h60
C24: Top Overlay "+" at 3970,810 h60 r270
P1: Top Overlay "6" at 3425,155 h30 r180; Top Overlay "9" at 3095,155 h30 r180; Top Overlay "5" at 3040,265 h30 r180; Top Overlay "1" at 3470,265 h30 r180
P3: Top Overlay "1" at 1614.17,457.83 h39.37